# Altium PCB Adafruit HUZZAH32 ESP32 Feather.PcbDoc
Units mil, origin at the board's own origin, x right, y up, seen from the top; angles counter-clockwise.
Board outline 2000 x 900 mil, 2 copper layers (Top, Bottom), stack 61.811 mil thick; 40 components, 43 nets, 180 pads, 98 vias.
Unrouted connection lines stored in the file: 4.
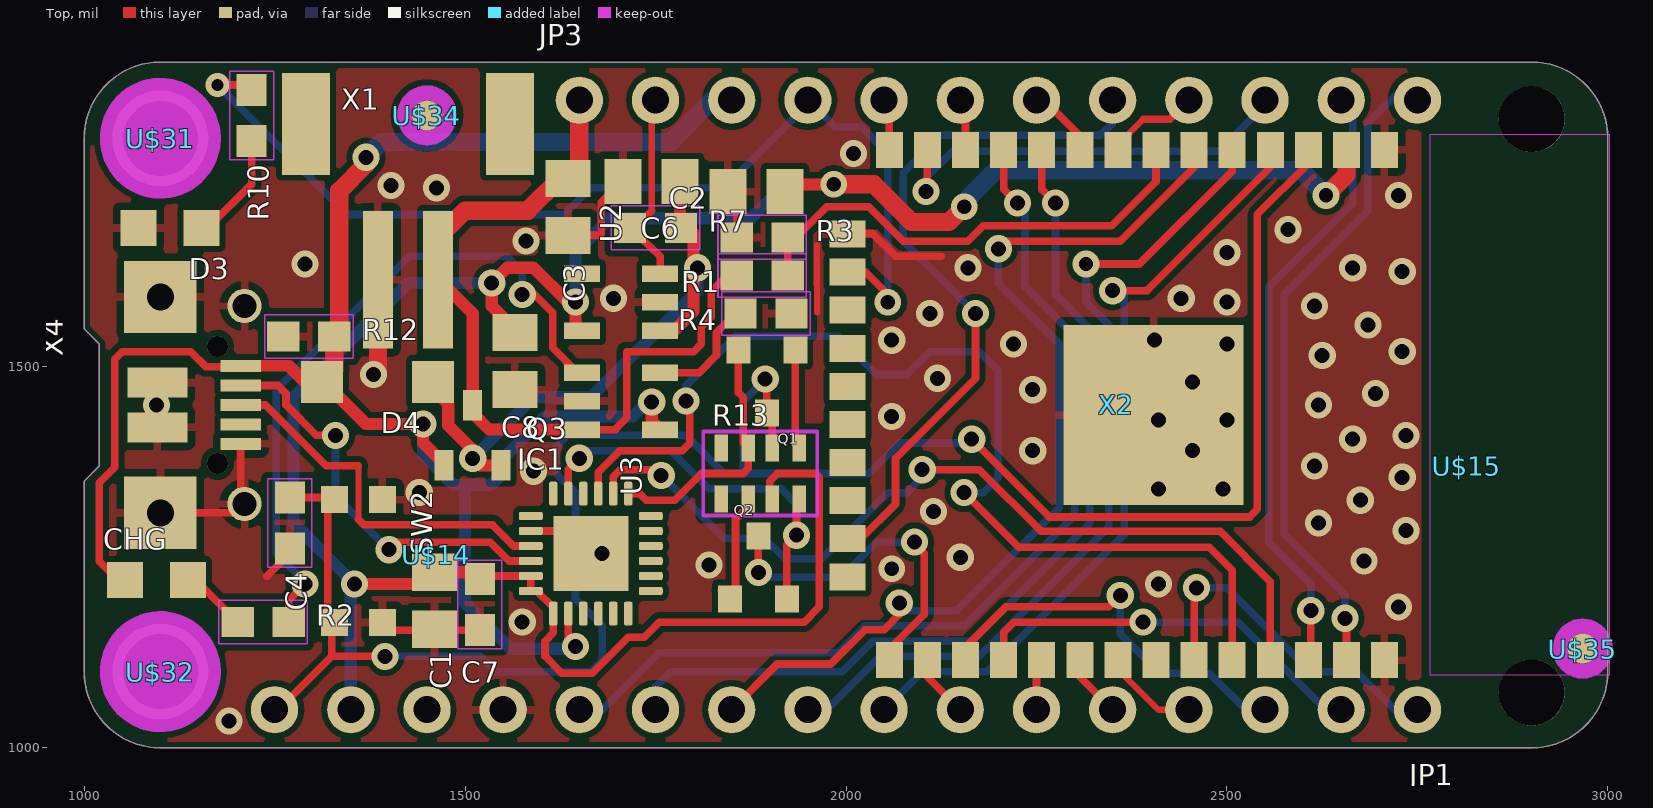
[diagram p0: Top view]
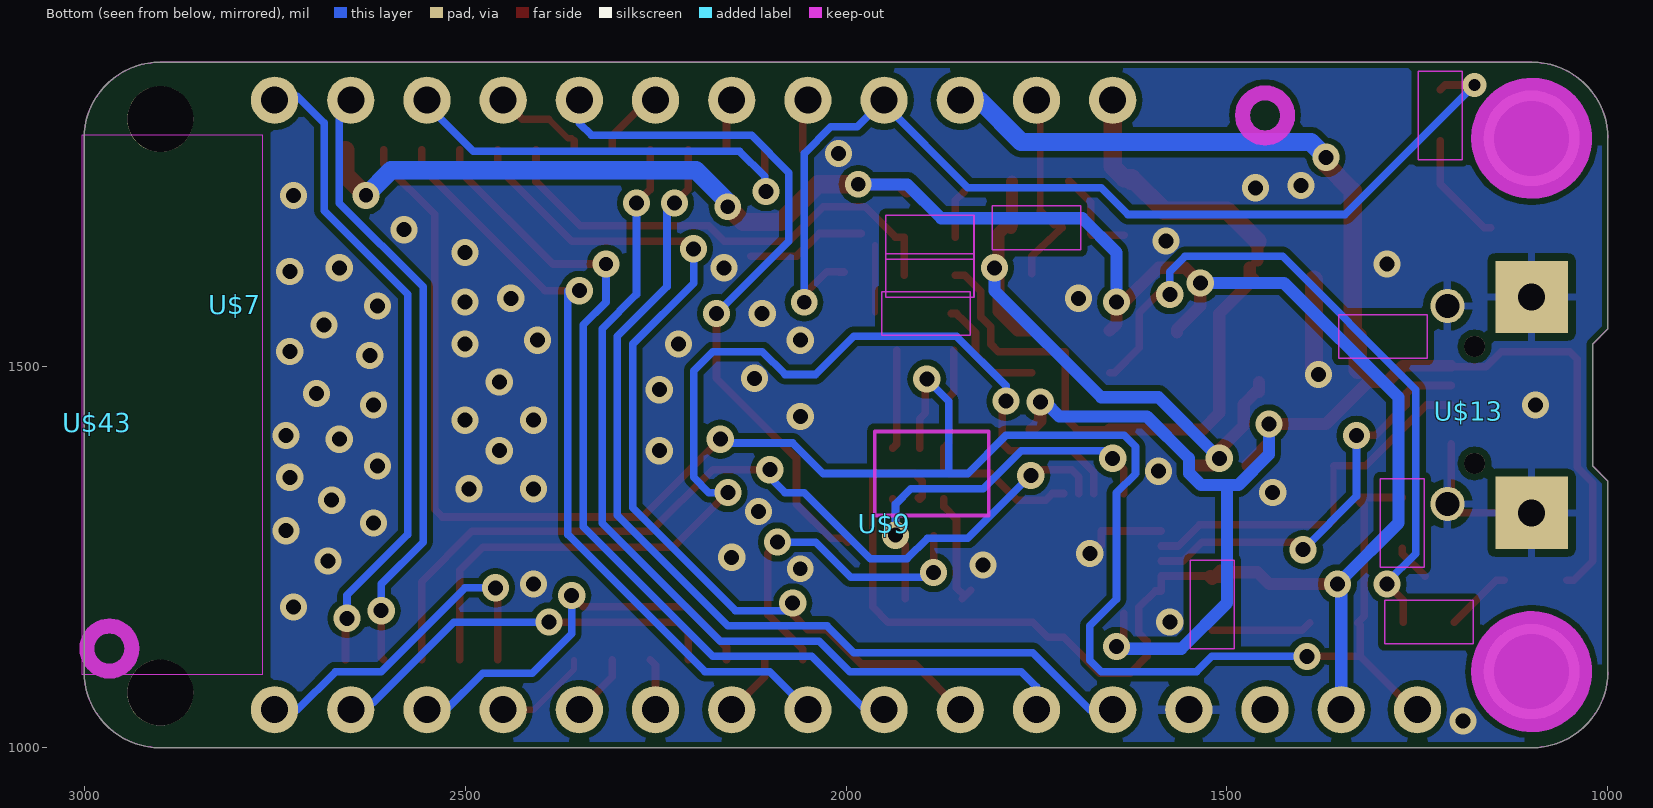
[diagram p1: Bottom view, seen from below]

## Layer stack, top to bottom
Top Solder: solder mask 0.4, Solder Resist, Dk 3.5
Top: signal copper 1.378
Dielectric 1: core 59.0551, FR-4, Dk 4.8
Bottom: signal copper 1.378
Bottom Solder: solder mask 0.4, Solder Resist, Dk 3.5

## Board outline
1100,1000 2900,1000 ccw(c2900,1100) 3000,1100 3000,1800 ccw(c2900,1800) 2900,1900 1100,1900 ccw(c1100,1800) 1000,1800 1000,1550 1020,1530 1020,1370 1000,1350 1000,1100 ccw(c1100,1100)

## Design rules (kind name [scope] priority, off if disabled: settings)
Clearance [All] p1: gap=8 ignorepadtopadclearanceinfootprint=FALSE except(0: SMDPad-SMDPad SMDPad-THPad SMDPad-Via; 7: Track-THPad Track-Via THPad-THPad THPad-Via Via-Via)
Clearance "Clearance (Same Net)" [All] p2: gap=0 ignorepadtopadclearanceinfootprint=FALSE except(7: SMDPad-SMDPad SMDPad-THPad SMDPad-Via)
HoleSize HoleSize_1 [All] p1: absolutevalues=TRUE maxlimit=100000 minlimit=15.5 maxpercent=80.000 minpercent=20.000
HoleSize [All] p2: absolutevalues=TRUE maxlimit=100 minlimit=1 maxpercent=80.000 minpercent=20.000
HoleToHoleClearance mdViaViaSameLayer [All] p1: gap=8 allowstackedmicrovias=TRUE
HoleToHoleClearance [All] p2: gap=10 allowstackedmicrovias=TRUE
PasteMaskExpansion mlMinCreamFrame [All] p1: expansion=0
PasteMaskExpansion [All] p2: expansion=0
PolygonConnect ThermalVias [IsVia] p1: connectstyle=Direct reliefconductorwidth=10 reliefentries=4 polygonreliefangle="90 Angle" airgapwidth=10
PolygonConnect [All] p2: connectstyle=Relief reliefconductorwidth=10 reliefentries=4 polygonreliefangle="90 Angle" airgapwidth=10
RoutingVias [All] p1: holewidth=28 width=50 viastyle="Through Hole" minholewidth=28 minwidth=50 maxholewidth=28 maxwidth=50
SilkToSilkClearance [All] p1 off: silktosilkclearance=10
SilkToSolderMaskClearance [IsPad] p1 off: minsilkscreentomaskgap=10 clearancetoexposedcopper=TRUE
SolderMaskExpansion mlMinStopFrame [All] p1: expansion=2
SolderMaskExpansion [All] p2: expansion=4
Width Width_1 [All] p1: maxlimit=100000 minlimit=6 preferedwidth=10
Width [All] p2: maxlimit=10 minlimit=10 preferedwidth=10
25 further rules are at their usual default settings.

## Components (designator, comment, footprint, x,y, rotation, side; value= is the part's Value field where it differs from the comment)
C1 "10uF" 0805-NO 1460,1193 r270 top
C2 "10uF" 0805-NO 1882.5,1730 r180 top
C3 "10µF" 0805-NO 1635,1710 r270 top
C4 "1uF" 0603-NO 1270,1295 r270 top
C6 "10µF" 0805-NO 1744.8,1743.43 r180 top
C7 "1uF" 0603-NO 1519.33,1187.99 r270 top
C8 "10µF" 0805-NO 1565.59,1507.64 r270 top
CHG "ORANGE" CHIPLED_0805_NOOUTLINE 1095,1220 r270 top
D3 "RED" CHIPLED_0805_NOOUTLINE 1112.5,1682.5 r90 top
D4 "MBR120" SOD-123 1385,1480 r180 top
IC1 "CP2104" QFN24_4MM_SMSC 1665,1255 r0 top
JP1 "" 1X16_ROUND_MIN 2000,1050 r180 top
JP3 "" 1X12_ROUND_MIN 2200,1850 r0 top
Q1 "mmbt2222" SOT23-3 1896,1482.5 r180 top
Q2 "mmbt2222" SOT23-3 1885,1235 r0 top
Q3 "DMG3415U" SOT23-R 1510,1410 r0 top
R1 "100K" 0603-NO 1890,1620 r180 top
R2 "1K" 0603-NO 1235,1165 r0 top
R3 "100K" 0603-NO 1890,1670 r0 top
R4 "4.7K" 0603-NO 1895,1570 r180 top
R7 "100K" 0603-NO 1750,1682.5 r0 top
R10 "1K" 0603-NO 1220,1830 r270 top
R12 "100K" 0603-NO 1295,1540 r0 top
R13 "10K" RESPACK_4X0603 1887.5,1360 r0 top
SW2 "KMR2" BTN_KMR2_4.6X2.8 1360,1245 r270 top
U2 "AP2112-3.3" SOT23-5 1705,1585 r90 top
U3 "MCP73831T-2ACI/OT" SOT23-5 1705,1455 r270 top
U$7 "" ADAFRUIT_5MM 2802.5,1582.5 r90 bottom
U$9 "" FEATHERLOGO_MED 1950,1295 r180 bottom
U$13 "" PCBFEAT-REV-040 1182.5,1442.5 r180 bottom
U$14 "" ADAFRUIT_2.5MM 1462,1254 r0 top
U$15 "" ADAFRUIT_3.5MM 2815,1370 r0 top
U$31 "" MOUNTINGHOLE_2.5_PLATED 1100,1800 r270 top
U$32 "" MOUNTINGHOLE_2.5_PLATED 1100,1100 r270 top
U$34 "" FIDUCIAL_1MM 1450,1830 r270 top
U$35 "" FIDUCIAL_1MM 2966.86,1130.28 r270 top
U$43 "" HUZZAH32 2982.5,1427.5 r180 bottom
X1 "JSTPH" JSTPH2 1425,1760 r0 top
X2 "" WROOM32_SKINNY 2510,1450 r270 top
X4 "20329" 4UCONN_20329_V2 1175,1450 r270 top

## Footprints (in the part's own frame and the unit in brackets; to place one, negate y for a bottom-side part, rotate by r counter-clockwise, add the part's x,y. Pads: shape width x height; smd on the part's side, far side on the other; paste and mask are expansions set on the pad)
1X12_ROUND_MIN [mil] "1X12_ROUND_MIN"
  round 62 hole 35.43: 1(-550,0) 2(-450,0) 3(-350,0) 4(-250,0) 5(-150,0) 6(-50,0) 7(50,0) 8(150,0) 9(250,0) 10(350,0) 11(450,0) 12(550,0)
1X16_ROUND_MIN [mil] "1X16_ROUND_MIN"
  round 62 hole 35.43: 1(-750,0) 2(-650,0) 3(-550,0) 4(-450,0) 5(-350,0) 6(-250,0) 7(-150,0) 8(-50,0) 9(50,0) 10(150,0) 11(250,0) 12(350,0) 13(450,0) 14(550,0) 15(650,0) 16(750,0)
4UCONN_20329_V2 [mm] "4UCONN_20329_V2"
  round 0.7 hole 0.7: 1(-1.95,0) 1(1.95,0)
  rect 1x2 smd: BASE@1(-0.75,-2) BASE@2(0.75,-2)
  rect 0.4x1.35 smd paste-0.675 mask-0.675: D+(0,0.775) D-(-0.65,0.775) GND(1.3,0.775) ID(0.65,0.775) VBUS(-1.3,0.775)
  round 1.143 hole 0.8: SPRT@1(-3.3,0.9) SPRT@2(3.3,0.9)
  rect 2.413x2.413 hole 0.9: SPRT@3(-3.6,-1.9) SPRT@4(3.6,-1.9)
0603-NO [mm] "0603-NO"
  rect 1.075x1 smd: 1(-0.85,0) 2(0.85,0)
  Keep-Out Layer lines w0.051: 1.473,-0.729 1.473,0.729 -1.473,0.729 -1.473,-0.729 1.473,-0.729
0805-NO [mil] "0805-NO"
  rect 48.82x59.06 smd: 1(-37.4,0) 2(37.4,0)
ADAFRUIT_2.5MM [mil] "ADAFRUIT_2.5MM"
ADAFRUIT_3.5MM [mil] "ADAFRUIT_3.5MM"
ADAFRUIT_5MM [mil] "ADAFRUIT_5MM"
BTN_KMR2_4.6X2.8 [mil] "BTN_KMR2_4.6X2.8"
  rect 35.43x35.43 smd: A(80.71,31.5) A'(-80.71,31.5) B(80.71,-31.5) B'(-80.71,-31.5)
CHIPLED_0805_NOOUTLINE [mil] "CHIPLED_0805_NOOUTLINE"
  rect 47.24x47.24 smd: A(0,-41.34) C(0,41.34)
FEATHERLOGO_MED [mil] "FEATHERLOGO_MED"
FIDUCIAL_1MM [mm] "FIDUCIAL_1MM"
  rrect100% 1x1 smd paste-0.5: 1(0,0)
  Top keep-out lines w0.5: 0,-0.75 ccw(c0,0) 0.75,0 ccw(c0,0) 0,0.75 ccw(c0,0) -0.75,0 ccw(c0,0) 0,-0.75
  Keep-Out Layer lines w0.5: 0,-0.75 ccw(c0,0) 0.75,0 ccw(c0,0) 0,0.75 ccw(c0,0) -0.75,0 ccw(c0,0) 0,-0.75
HUZZAH32 [mil] "HUZZAH32"
JSTPH2 [mm] "JSTPH2"
  rect 1x4.6 smd: 1(-1,-3.7) 2(1,-3.7)
  rect 1.6x3.4 smd: NC1(-3.4,1.5) NC2(3.4,1.5)
MOUNTINGHOLE_2.5_PLATED [mil] "MOUNTINGHOLE_2.5_PLATED"
  round 125.98 hole 98.43: P$1(0,0)
  Top keep-out circle w80: c0,0 r39.37
  Bottom keep-out circle w80: c0,0 r39.37
  Keep-Out Layer circle w80: c0,0 r39.37
  Keep-Out Layer circle w80: c0,0 r39.37
PCBFEAT-REV-040 [mil] "PCBFEAT-REV-040"
QFN24_4MM_SMSC [mil] "QFN24_4MM_SMSC"
  rrect50% 31.5x11.02 smd: 1(-78.74,49.21) 2(-78.74,29.53) 3(-78.74,9.84) 4(-78.74,-9.84) 5(-78.74,-29.53) 6(-78.74,-49.21) 13(78.74,-49.21) 14(78.74,-29.53) 15(78.74,-9.84) 16(78.74,9.84) 17(78.74,29.53) 18(78.74,49.21)
  rrect50% 11.02x31.5 smd: 7(-49.21,-78.74) 8(-29.53,-78.74) 9(-9.84,-78.74) 10(9.84,-78.74) 11(29.53,-78.74) 12(49.21,-78.74) 19(49.21,78.74) 20(29.53,78.74) 21(9.84,78.74) 22(-9.84,78.74) 23(-29.53,78.74) 24(-49.21,78.74)
  rect 98.43x98.43 smd paste-49.22: THERM(0,0)
RESPACK_4X0603 [mil] "RESPACK_4X0603"
  rect 17.72x35.43 smd: 1(-51.18,-33.46) 2(-15.75,-33.46) 3(15.75,-33.46) 4(51.18,-33.46) 5(51.18,33.46) 6(15.75,33.46) 7(-15.75,33.46) 8(-51.18,33.46)
  Keep-Out Layer lines w5: -74.8,-55.12 -74.8,55.12 74.8,55.12 74.8,-55.12 -74.8,-55.12
SOD-123 [mil] "SOD-123"
  rect 55.12x55.12 smd: A(72.83,0) C(-72.83,0)
SOT23-3 [mil] "SOT23-3"
  rect 31.5x35.43 smd: 1(-37.4,-39.37) 2(37.4,-39.37) 3(0,43.31)
SOT23-5 [mil] "SOT23-5"
  rect 21.65x47.24 smd: 1(-37.4,-51.19) 2(0,-51.19) 3(37.4,-51.19) 4(37.4,51.19) 5(-37.4,51.19)
SOT23-R [mil] "SOT23-R"
  rect 25x40 smd: 1(-37.4,-39.37) 2(37.4,-39.37) 3(0,39.37)
WROOM32_SKINNY [mm] "WROOM32_SKINNY"
  rect 1.2x0.9 smd: 1(-8.5,5) 2(-8.5,3.73) 3(-8.5,2.46) 4(-8.5,1.19) 5(-8.5,-0.08) 6(-8.5,-1.35) 7(-8.5,-2.62) 8(-8.5,-3.89) 9(-8.5,-5.16) 10(-8.5,-6.43) 11(-8.5,-7.7) 12(-8.5,-8.97) 13(-8.5,-10.24) 14(-8.5,-11.51) 25(8.5,-11.51) 26(8.5,-10.24) 27(8.5,-8.97) 28(8.5,-7.7) 29(8.5,-6.43) 30(8.5,-5.16) 31(8.5,-3.89) 32(8.5,-2.62) 33(8.5,-1.35) 34(8.5,-0.08) 35(8.5,1.19) 36(8.5,2.46) 37(8.5,3.73) 38(8.5,5)
  rect 0.9x1.2 smd: 15(-5.7,-12.9) 16(-4.43,-12.9) 17(-3.16,-12.9) 18(-1.89,-12.9) 19(-0.62,-12.9) 20(0.65,-12.9) 21(1.92,-12.9) 22(3.19,-12.9) 23(4.46,-12.9) 24(5.73,-12.9)
  rect 6x6 smd paste-3: P$1(0.34,-2.7)
  Keep-Out Layer region: -9,6.5 9,6.5 9,12.5 -9,12.5

## Part data
C1 C2 C3 C6 C8: library part 0805-NO
C4 C7 R1 R2 R3 R4 R7 R10 R12: library part 0603-NO
CHG D3: library part CHIPLED_0805_NOOUTLINE
D4: library part SOD-123
IC1: library part QFN24_4MM_SMSC
JP1: library part 1X16_ROUND_MIN
JP3: library part 1X12_ROUND_MIN
Q1 Q2: library part SOT23-3
Q3: library part SOT23-R
R13: library part RESPACK_4X0603
SW2: library part BTN_KMR2_4.6X2.8
U2 U3: library part SOT23-5
U$7: library part ADAFRUIT_5MM
U$9: library part FEATHERLOGO_MED
U$13: library part PCBFEAT-REV-040
U$14: library part ADAFRUIT_2.5MM
U$15: library part ADAFRUIT_3.5MM
U$31 U$32: library part MOUNTINGHOLE_2.5_PLATED
U$34 U$35: library part FIDUCIAL_1MM
U$43: library part HUZZAH32
X1: library part JSTPH2
X2: library part WROOM32_SKINNY
X4: library part 4UCONN_20329_V2

## Free pads (board coordinates)
  round 86.61 hole 86.61: 1(2900,1072.5) 1(2900,1825)

## Via types
v1: diameter 35.69/35.69 (per signal layer), hole 19.69, Top to Bottom, 91 vias
v2: diameter 35/35 (per signal layer), hole 19, Top to Bottom, 6 vias
v3: diameter 31.5/31.5 (per signal layer), hole 15.5, Top to Bottom, 1 vias

## Nets (pads, with @x,y where several pads share a name; then routed paths per layer and width w, separated by ;. In a path a pad name is that pad's centre, name@x,y a point inside that pad or via, vN(x,y) a via of type N, cw(c..) or ccw(c..) an arc to the next point about the centre after c; other vN are vias at no path point)
3.3V: C1.1 C2.1 C7.1 C8.1 IC1.5 IC1.6 IC1.7 JP1.15 R13.3 U2.5 X2.2 | length 3399.7
  Top w10: C7.1@1504.06,1221.46 C7.1@1519.33,1221.46 ; C7.1@1521.93,1225.47 IC1.5 IC1.6 1594.21,1205.79 1615.79,1184.21 IC1.7 1615.79,1150.79 1605,1140 1605,1120 1627,1098 1667,1098 1714,1145 1735,1145 1755,1165 1945,1165 1965,1185 1965,1355 1960,1360 1910,1360 1900,1350 1900,1329.78 R13.3 R13.3@1905,1328.29
  Top w16: v1(1355,1215) 1444.6,1215 C1.1 1510.39,1230.4 C7.1@1519.33,1221.46 ; C7.1@1508.39,1232.4 C7.1@1519.33,1221.46 ; C7.1@1521.93,1225.47 1521.93,1224.06 C7.1@1519.33,1221.46 ; C8.1 1565.59,1549.41 1535,1580 v1(1535,1610) 1555,1630 1590,1630 1635,1585 v1(1645,1585) 1645,1556.41 U2.5 ; C2.1 1929.4,1739.5 v2(1984,1739.5)
  Top w24: v2(1984,1739.5) 2036.5,1739.5 2086,1690 2135,1690 v2(2155,1710) ; v2(2630,1725) 2656.85,1751.85 X2.2
  Bottom w16: JP1.15 v1@1350,1220 ; v1(1355,1215) v1@1350,1220 ; v1(1535,1610) 1425,1610 1275,1460 1275,1295 v1@1350,1220 ; v1(1645,1585) 1645,1650 1690,1695 1875,1695 1919.5,1739.5 v2(1984,1739.5) ; v2(2155,1710) v2@2160,1715
  Bottom w24: v2(2155,1710) 2155,1716 2197,1758 2597,1758 v2(2630,1725)
A0_DAC2: JP1.12 X2.11 | length 1274.4
  Top w10: X2.11 2206.85,1733.15 v1(2225,1715)
  Bottom w10: JP1.12 1680,1050 1755,1125 1990,1125 2025,1160 2155,1160 2300,1305 2300,1540 2235,1605 2235,1706 2234,1706 v1(2225,1715)
A1_DAC1: JP1.11 X2.10 | length 1205.2
  Top w10: X2.10 2256.85,1732.52 2257.48,1732.52 v1(2275,1715)
  Bottom w10: JP1.11 1750,1080 1770,1100 1995,1100 2035,1140 2165,1140 2320,1295 2320,1550 2275,1595 v1(2275,1715)
A2_I34: JP1.10 X2.6 | length 1253.9
  Top w10: JP1.10 1910,1110 1980,1110 2025,1155 2050,1155 2070,1175 v1(2070,1190) ; v1(2200,1655) 2210,1665 2360,1665 2456.85,1761.85 X2.6
  Bottom w10: v1(2070,1190) 2080,1180 2145,1180 2280,1315 2280,1530 2200,1610 v1(2200,1655)
A3_I39: JP1.9 X2.5 | length 1134
  Top w10: v2@2320,1635 2320,1640 v2(2315,1635) 2385,1635 2506.85,1756.85 X2.5
  Bottom w10: JP1.9 1975,1050 2045,1120 2175,1120 2345,1290 2345,1555 2315,1585 v2(2315,1635)
A4_IO36: JP1.8 X2.4 | length 1042
  Top w10: v1(2350,1600) 2395,1600 2556.85,1761.85 X2.4
  Bottom w10: JP1.8 2100,1100 2185,1100 2365,1280 2365,1600 v1(2350,1600)
A5_IO4: JP1.7 X2.26 | length 83.2
  Top w10: X2.26 2106.85,1093.15 JP1.7
A13_I35: R1.1 R3.2 X2.7 | length 642.6
  Top w10: R1.1 R3.2 1935,1670 1975,1710 2030,1710 2075,1665 2160,1665 2180,1685 2349,1685 2406.85,1742.85 X2.7
DTR: IC1.23 Q2.2 R13.4 | length 549.1
  Top w10: IC1.23 1635.47,1365.47 v1(1650,1380) ; Q2.2 1922.4,1266.4 v1(1935,1279) 1935,1322.85 R13.4
  Bottom w10: v1(1650,1380) 1660,1390 1770,1390 1820,1340 1915,1340 1935,1320 v1(1935,1279)
EN: JP3.2 R7.1 U2.3 | length 263.3
  Top w8: 1745,1705 JP3.2@1745,1825
  Top w10: 1745,1705 1726.54,1686.54 1718.07,1686.54 R7.1 1756.19,1645.35 U2.3 ; JP3.2@1745,1825 1750,1830 JP3.2
GND: C1.2 C2.2 C3.2 C4.2 C6.2 C7.2 C8.2 D3.C IC1.2 IC1.THERM JP1.13 R3.1 R4.1 R12.1 SW2.A SW2.A' U2.2 U3.2 X1.1 X2.1 X2.15 X2.38 X2.P$1 X4.BASE@1 X4.BASE@2 X4.GND X4.SPRT@1 X4.SPRT@2 X4.SPRT@3 X4.SPRT@4 | length 1087.9
  Top w8: 1962,1571.54 1962,1660
  Top w10: 1062.8,1591.73 1100.2,1591.73 ; 1100.2,1308.27 1198.62,1308.27 1210.43,1320.08 1205.51,1325 X4.GND ; 1240,1225 1270,1255 C4.2 ; SW2.A 1401.26,1154.53 C7.2 ; IC1.2 1665,1284.53 1665,1265 1670,1265 v1(1680,1255) ; C3.2 1677.6,1672.6 ; 1679,1675 1679,1716.02 1706.4,1743.43 C6.2 ; C2.2 1856.54,1718.56 R3.1 ; X2.15@1980,1675 2035,1675 2065,1645 2125,1645
  Top w24: v1@1385.63,1491.97 X1.1
  other v1: 1190,1035 1575,1165 2725,1185 2410,1215 1820,1240 2680,1245 2150,1250 2735,1285 2620,1295 2115,1310 2675,1325 1440,1335 2410,1340 2495,1340 2730,1355 1590,1363 2615,1370 2245,1390 2455,1390 2665,1405 2735,1410 2410,1430 2500,1430 2060,1435 1095,1450 2620,1450 2695,1465 2245,1470 2455,1480 2120,1485 1380,1490 2625,1515 2730,1520 2220,1530 2500,1530 2060,1535 2405,1535 2685,1555 2110,1570 2615,1580 2500,1585 1695,1590 2440,1590 2730,1625 2160,1630 2665,1630 1290,1635 2500,1650 1580,1665 2580,1680 2725,1725 1462.5,1735 1403,1738 2010,1780
  other v2: 2060,1235
GPIO0: Q2.3 X2.25 | length 453.6
  Top w10: v1(1885,1230) Q2.3 ; X2.25 2056.85,1129.35 2102.5,1175 2102.5,1255 2090,1267.5 v1(2090,1270)
  Bottom w10: v1(1885,1230) 1891,1224 1994,1224 2040,1270 v1(2090,1270)
GPIO2: X2.24
IO12_A11: JP3.5 X2.14 | length 68.2
  Top w10: JP3.5 2056.85,1843.15 X2.14
IO13_A12: JP3.4 R10.1 X2.16 | length 1370
  Top w10: v3(1175,1870) 1213.46,1870 R10.1 ; X2.16@2009.41,1624.41 X2.16 2002.72,1625 2025,1625 2055,1595 v2(2055,1585)
  Bottom w10: v3(1175,1870) 1345,1700 1630,1700 1665,1735 1840,1735 1950,1845 JP3.4 1985,1815 2020,1815 2055,1780 v2(2055,1585)
IO14_A6: JP3.10 X2.13 | length 564.3
  Top w10: v1(2105,1730) 2106.85,1731.85 X2.13
  Bottom w10: v1(2105,1730) 2106.85,1731.85 2106.85,1750 2139.85,1783 2489,1783 2550,1844 JP3.10
IO15_A8: JP3.8 X2.23 | length 937.8
  Top w10: X2.23@1997.72,1270 X2.23 2002.72,1275 2020,1275 2065,1320 2065,1380 2170,1485 v1(2170,1570)
  Bottom w10: v1(2170,1570) 2075,1665 2075,1755 2124,1804 2334,1804 2350,1820 JP3.8
IO16: JP1.3 X2.27 | length 529.3
  Top w10: X2.27 2156.85,1131.85 2210,1185 2345,1185 v1(2360,1200)
  Bottom w10: v1(2360,1200) 2360,1150 2412,1098 2477,1098 2525,1050 JP1.3
IO17: JP1.2 X2.28 | length 532.7
  Top w10: X2.28 2206.85,1151.85 2220,1165 v1(2390,1165)
  Bottom w10: v1(2390,1165) 2515,1165 2620,1060 2640,1060 JP1.2
IO21: JP1.1 X2.33 | length 452.2
  Top w10: X2.33 2456.85,1206.85 v1(2460,1210)
  Bottom w10: v1(2460,1210) 2500,1210 2610,1100 2670,1100 2720,1050 JP1.1
IO27_A10: JP3.6 X2.12 | length 68.2
  Top w10: JP3.6 2156.85,1843.15 X2.12
IO32_A7: JP3.9 X2.8 | length 127.4
  Top w8: X2.8@2356.85,1796.85 2360,1800 2365,1800 2390,1825
  Top w10: X2.8 X2.8@2356.85,1796.85 ; 2390,1825 2425,1825 JP3.9
IO33_A9: JP3.7 X2.9 | length 94.8
  Top w10: JP3.7 2260,1850 2306.85,1803.15 X2.9
MISO: JP1.4 X2.31 | length 127.4
  Top w8: X2.31 2356.85,1103.15 2410,1050 JP1.4
MOSI: JP1.5 X2.30 | length 83.2
  Top w10: X2.30 2306.85,1093.15 JP1.5
N$1: CHG.C R2.1 | length 88
  Top w10: CHG.C 1146.54,1220 R2.1
N$2: IC1.3 X4.D+ | length 498.5
  Top w8: 1360,1300 1360,1370
  Top w10: X4.D+ 1238,1450 1318,1370 1360,1370 ; 1360,1300 1367,1293 1536,1293 1564.16,1264.84 IC1.3
N$3: R2.2 U3.1 | length 911.7
  Top w10: R2.2 1268.46,1193.46 v1(1290,1215) ; v1(1575,1595) 1591,1595 1615,1571 1615,1525 1647.6,1492.4 U3.1
  Bottom w10: v1(1290,1215) 1290,1217 1252,1255 1252,1470 1427,1645 1555,1645 1575,1625 v1(1575,1595)
N$4: R4.2 U3.5 | length 155.1
  Top w10: U3.5 1777.4,1492.4 1807.4,1492.4 1830,1515 1830,1545 1845,1560 1855,1570 R4.2
N$5: D3.A R10.2 | length 146.5
  Top w10: D3.A 1162.5,1682.5 1220,1740 R10.2
N$6: IC1.4 X4.D- | length 540.1
  Top w10: X4.D- 1254.41,1475.59 1265,1465 1265,1450 1305,1410 v1(1330,1410) ; v1(1400,1260) 1410,1270 1533,1270 1557.84,1245.16 IC1.4
  Bottom w10: v1(1330,1410) 1330,1330 v1(1400,1260)
N$7: C6.1 D4.C Q3.2 R7.2 U2.1 | length 847.5
  Top w16: D4.C@1457.83,1467.17 D4.C 1457.83,1471.17 1478,1451 1478,1423 1510,1391 v1(1510,1380) ; v1@1510,1392 v1(1510,1380) ; Q3.2 1519.37,1370.63 v1(1510,1380) ; U2.1 1774.6,1547.6 1800,1573 v1@1800,1630 ; C6.1 1782.2,1686.26 R7.2 1790,1685 1800,1675 v1@1800,1630 ; v1(1805,1630) v1@1800,1630
  Bottom w16: v1(1510,1380) 1590,1460 1665,1460 1805,1600 v1(1805,1630)
N$12: Q1.1 R13.5 | length 130.6
  Top w10: Q1.1 1933.4,1398.74 R13.5
N$13: Q2.1 R13.2 | length 159
  Top w10: Q2.1@1836.32,1206.91 Q2.1 1845,1198.23 1845,1200 1855,1210 1855,1300 1871.75,1316.75 R13.2
RESET: C4.1 JP1.16 Q1.3 R13.6 SW2.B SW2.B' X2.3 | length 2795.5
  Top w10: JP1.16 1255,1050 1325,1120 ; C4.1 1325.75,1328.46 SW2.B' 1322.8,1320 1320,1320 1320,1172.8 SW2.B 1325,1160.79 1325,1120 ; v1(1395,1120) 1325,1120 ; v1(1894,1484) 1896,1482 Q1.3 1903.25,1431.94 R13.6 ; v1(2165,1405) 2267,1303 2530,1303 2540,1313 2540,1700 2606.85,1766.85 X2.3
  Bottom w10: v1(1395,1120) 1520,1120 1540,1100 1665,1100 1680,1115 1680,1160 1645,1195 1645,1335 1620,1360 1620,1395 1635,1410 1790,1410 1840,1360 1865,1360 ; v1(1894,1484) 1865,1455 1865,1360 ; v1(2165,1405) 2160,1400 2070,1400 2030,1360 1865,1360
RTS: IC1.19 Q1.2 R13.7 | length 339
  Top w10: IC1.19 1729.21,1333.74 1737.95,1325 1775,1325 1810,1360 1865,1360 1871.75,1366.75 R13.7 1865,1400.22 1865,1460 1858.6,1466.4 Q1.2
RXD0: IC1.21 X2.34 | length 1431.7
  Top w10: IC1.21 1674.84,1361.84 1703,1390 1785,1390 1795,1400 1795,1450 v1(1790,1455) ; v1@2160,1335 v1(2155,1335) 2227,1263 2477,1263 2506.85,1233.15 X2.34
  Bottom w10: v1(1790,1455) 1790,1475 1855,1540 1990,1540 2040,1490 2080,1490 2110,1520 2175,1520 2200,1495 2200,1355 2180,1335 v1(2155,1335)
SCK: JP1.6 X2.29 | length 68.2
  Top w10: JP1.6 2250,1108.5 X2.29
SCL: JP3.11 X2.36 | length 810.5
  Top w10: X2.36 2610,1118.5 v1(2610,1180)
  Bottom w10: v1(2610,1180) 2610,1215 2555,1270 2555,1605 2665,1715 2665,1835 JP3.11
SDA: JP3.12 X2.37 | length 865.7
  Top w10: v1(2655,1170) 2656.85,1168.15 X2.37
  Bottom w10: v1(2655,1170) 2655,1200 2575,1280 2575,1595 2685,1705 2685,1820 2720,1855 2745,1855 JP3.12
TXD0: IC1.20 X2.35 | length 1154.4
  Top w10: IC1.20 1694.53,1355.53 1704,1365 1750,1365 v1(1757.5,1357.5) ; v1(2100,1365) 2175,1365 2256,1284 2491,1284 2556.85,1218.15 X2.35
  Bottom w10: v1(1757.5,1357.5) 1840,1275 1893,1275 1920,1248 1968,1248 2055,1335 2080,1335 2100,1355 v1(2100,1365)
VBAT: C3.1 JP3.1 Q3.3 R1.2 U3.3 X1.2 | length 1106.7
  Top w10: X1.2@1460,1640 X1.2@1470.02,1629.98 ; U3.3 1697.6,1417.6 1697.6,1418.6 1712,1433 1712,1520 1800,1520 1810,1530 1810,1552.5 1823,1565.5 1823,1599 1844,1620 1845,1620 R1.2
  Top w16: X1.2@1460,1640 X1.2@1460,1665 ; X1.2 X1.2@1470.02,1619.98 ; X1.2@1470.02,1629.98 X1.2@1470.02,1619.98 ; C3.1@1627.17,1740 C3.1@1634.57,1747.4 ; U3.3 1531.77,1417.6 1510,1439.37 Q3.3 1510,1570 1470.02,1609.98 X1.2@1470.02,1619.98
  Top w24: X1.2@1460,1665 1500,1705 1582.17,1705 1624.57,1747.4 C3.1@1634.57,1747.4 ; C3.1 C3.1@1634.57,1747.4 ; JP3.1 1650,1762.83 C3.1@1634.57,1747.4
VBUS: CHG.A D4.A IC1.8 JP3.3 Q3.1 R12.2 U3.4 X4.VBUS | length 2490.1
  Top w10: CHG.A 1045,1220 1020,1245 1020,1348 1040,1368 1040,1510 1050,1520 1140,1520 1160,1500 1204.33,1500 X4.VBUS ; D4.A D4.A@1328.46,1496.3 ; IC1.8 1635.47,1142.53 v1(1645,1133)
  Top w15: X4.VBUS 1268.82,1501.18
  Top w16: 1268.82,1501.18 1290,1480 D4.A 1315,1480 1370,1425 v1(1445,1425) 1445,1400 1472.6,1372.4 Q3.1 ; v1(1745,1453.78) 1745,1428.78 U3.4
  Top w24: D4.A@1328.46,1496.3 R12.2 1335,1546.54 1335,1731 1370,1766 v1(1370,1775)
  Bottom w16: v1(1445,1425) 1445,1385 1485,1345 1500,1345 ; v1(1645,1133) 1642,1130 1560,1130 1500,1190 1500,1345 ; v1(1745,1453.78) 1738.78,1453.78 1720,1435 1605,1435 1550,1380 1550,1360 1549,1360 1534,1345 1500,1345
  Bottom w24: v1(1370,1775) 1390,1795 1770,1795 1825,1850 JP3.3
pads on no net: IC1.1 IC1.9 IC1.10 IC1.11 IC1.12 IC1.13 IC1.14 IC1.15 IC1.16 IC1.17 IC1.18 IC1.22 IC1.24 JP1.14 R13.1 R13.8 U2.4 U$31.P$1 U$32.P$1 U$34.1 U$35.1 X1.NC1 X1.NC2 X2.17 X2.18 X2.19 X2.20 X2.21 X2.22 X2.32 X4.1 X4.ID

## Polygon pours and split planes (outlines as drawn)
GND on Top "Top-GND" (solid, remove dead copper, pour order 0): 995,1905 995,995 2755,995 2755,1905
GND on Bottom "Bottom-GND" (solid, remove dead copper, pour order 2): 995,995 2755,995 2755,1905 995,1905

## Keep-outs
Keep-Out Layer:
  the board outline again, w0

## Silkscreen, mask and mechanical layers (free items; w line width, h text height)
Dimension:
  the board outline again, w0
Top Assembly:
  text "12" at 2114.9,1834.95 h49.6 r90
  text "15" at 2415.11,1832.67 h49.6 r90
  text "33" at 2314.55,1832.32 h49.6 r90
  text "32" at 2515.05,1832.48 h49.6 r90
  text "27" at 2215.9,1830.97 h49.6 r90
  text "14" at 2613.9,1830.35 h49.6 r90
  text "SCL" at 2715.38,1818.77 h46.5 r90
  text "SDA" at 2823.88,1810.47 h49.6 r90
  text "BAT" at 1598.66,1775.14 h62
  text "EN" at 1715.95,1775.14 h62
  text "13" at 1928.42,1774.71 h62
  text "USB" at 1801.63,1774.47 h62
  text "#13" at 1229.11,1675.27 h62 r90
  text "reset" at 1303.33,1359.53 h62
  text "CHG" at 1166.47,1195.79 h62
  text "huzzah!" at 1795.75,1177.11 h34 r90
  text "ESP32!" at 1829.22,1141.22 h29.75
  text "RST" at 1197.26,1095.79 h62
  text "3V" at 1322.45,1091.14 h62
  text "NC" at 1418.13,1090.79 h62
  text "GND" at 1496.31,1090.79 h62
  text "A0" at 1627.34,1091.06 h62
  text "A1" at 1726.16,1090.07 h62
  text "A3" at 1921.33,1088.71 h62
  text "A2" at 1821.53,1088.07 h62
  text "21" at 2822.43,1030.61 h54.25 r90
  text "MI" at 2514.88,1030.33 h46.5 r90
  text "A5" at 2217.66,1026.29 h54.25 r90
  text "RX" at 2614.88,1022.9 h46.5 r90
  text "A4" at 2117.37,1021.49 h54.25 r90
  text "TX" at 2714.88,1019.06 h46.5 r90
  text "MO" at 2414.86,1017.99 h48.05 r90
  text "SCK" at 2314.39,1008.26 h46.5 r90
Bottom Assembly:
  text "3.7/4.2V" at 1565.54,1854.09 h34
  text "LiPoly Batt" at 1610.85,1814.42 h34
  text "USB" at 1873.03,1790.87 h62 r90
  text "BAT" at 1667.36,1788.84 h62 r90
  text "En" at 1767.36,1782.32 h62 r90
  text "ÂµUSB charge" at 1593.86,1780.42 h34
  text "SDA/23" at 2768.06,1775.56 h62 r90
  text "33/A9" at 2273.05,1772.6 h62 r90
  text "32/A7" at 2468.05,1772.56 h62 r90
  text "SCL/22" at 2673.05,1772.29 h62 r90
  text "15/A8" at 2368.03,1770.75 h62 r90
  text "14/A6" at 2568.03,1770.71 h62 r90
  text "27/A10" at 2168.03,1768.23 h62 r90
  text "13/A12" at 1968.05,1765.93 h62 r90
  text "12/A11" at 2068.03,1762.3 h62 r90
  text "ESP32 Feather" at 1865,1560 h42.5
  text "16MB Flash" at 1865,1517.5 h42.5
  text "WiFI+BT" at 1865,1475 h42.5
  text "Contains FCCID" at 2980,1334 h34
  text "MOSI/18" at 2373.05,1328.68 h62 r90
  text "MISO/19" at 2473.05,1328.68 h62 r90
  text "2AC7Z-ESP32" at 2980,1300 h34
  text "A1" at 1772.43,1281.14 h62 r90
  text "A0" at 1667.76,1276.14 h62 r90
  text "RX/16" at 2568.03,1266.14 h62 r90
  text "SCK/5" at 2268.05,1265.29 h62 r90
  text "TX/17" at 2673.03,1264.59 h62 r90
  text "A2/34" at 1868.05,1258.66 h62 r90
  text "A3/39" at 1968.05,1258.78 h62 r90
  text "A4/36" at 2073.05,1258.73 h62 r90
  text "DAC1" at 1773.03,1244.26 h62 r90
  text "DAC2" at 1668.03,1242.89 h62 r90
  text "A5/4" at 2168.03,1228.24 h62 r90
  text "GND" at 1568.03,1211.19 h62 r90
  text "RST" at 1273.03,1205.24 h62 r90
  text "NC" at 1468.03,1174.37 h62 r90
  text "3V" at 1372.79,1170.05 h62 r90
  text "21" at 2767.43,1162.41 h62 r90

## Dimensions
1810,1000 to 1950,1900 on Measures
2900,1075 to 2900,1825 on Measures
1000,1620 to 3000,1200 on Measures
1100,1800 to 2900,1825 on Measures
1050,1100 to 1150,1100 on Measures
2855,1070 to 2945,1075 on Measures
1000,1265 to 2000,1050 on Measures
1000,1815 to 2200,1850 on Measures
1000,1805 to 1425,1760 on Measures
1150,1000 to 1175,1450 on Measures

## Text inside footprints (layer, text, board x,y; h text height)
CHG: Assembly Top "A" at 1049.81,1214.65 h15.5 r90; Assembly Top "C" at 1152.17,1215.16 h15.5 r90
D3: Assembly Top "A" at 1167.62,1678.56 h15.5 r90; Assembly Top "C" at 1065.26,1678.56 h15.5 r90
U$13: Top Assembly ">REV" at 1196.5,1422.5 h62
X4: Assembly Top "PCB EDGE" at 1025.15,1394.51 h24.8 r90